# Altium PCB SwitchingPowerSupplyCourse_Board.PcbDoc
Units mm, origin at the board's own origin, x right, y up, seen from the top; angles counter-clockwise.
Board outline 50 x 50 mm, 6 copper layers (L1, L2, L3, L4, L5, L6), stack 0.535 mm thick; 41 components, 28 nets, 119 pads, 96 vias.
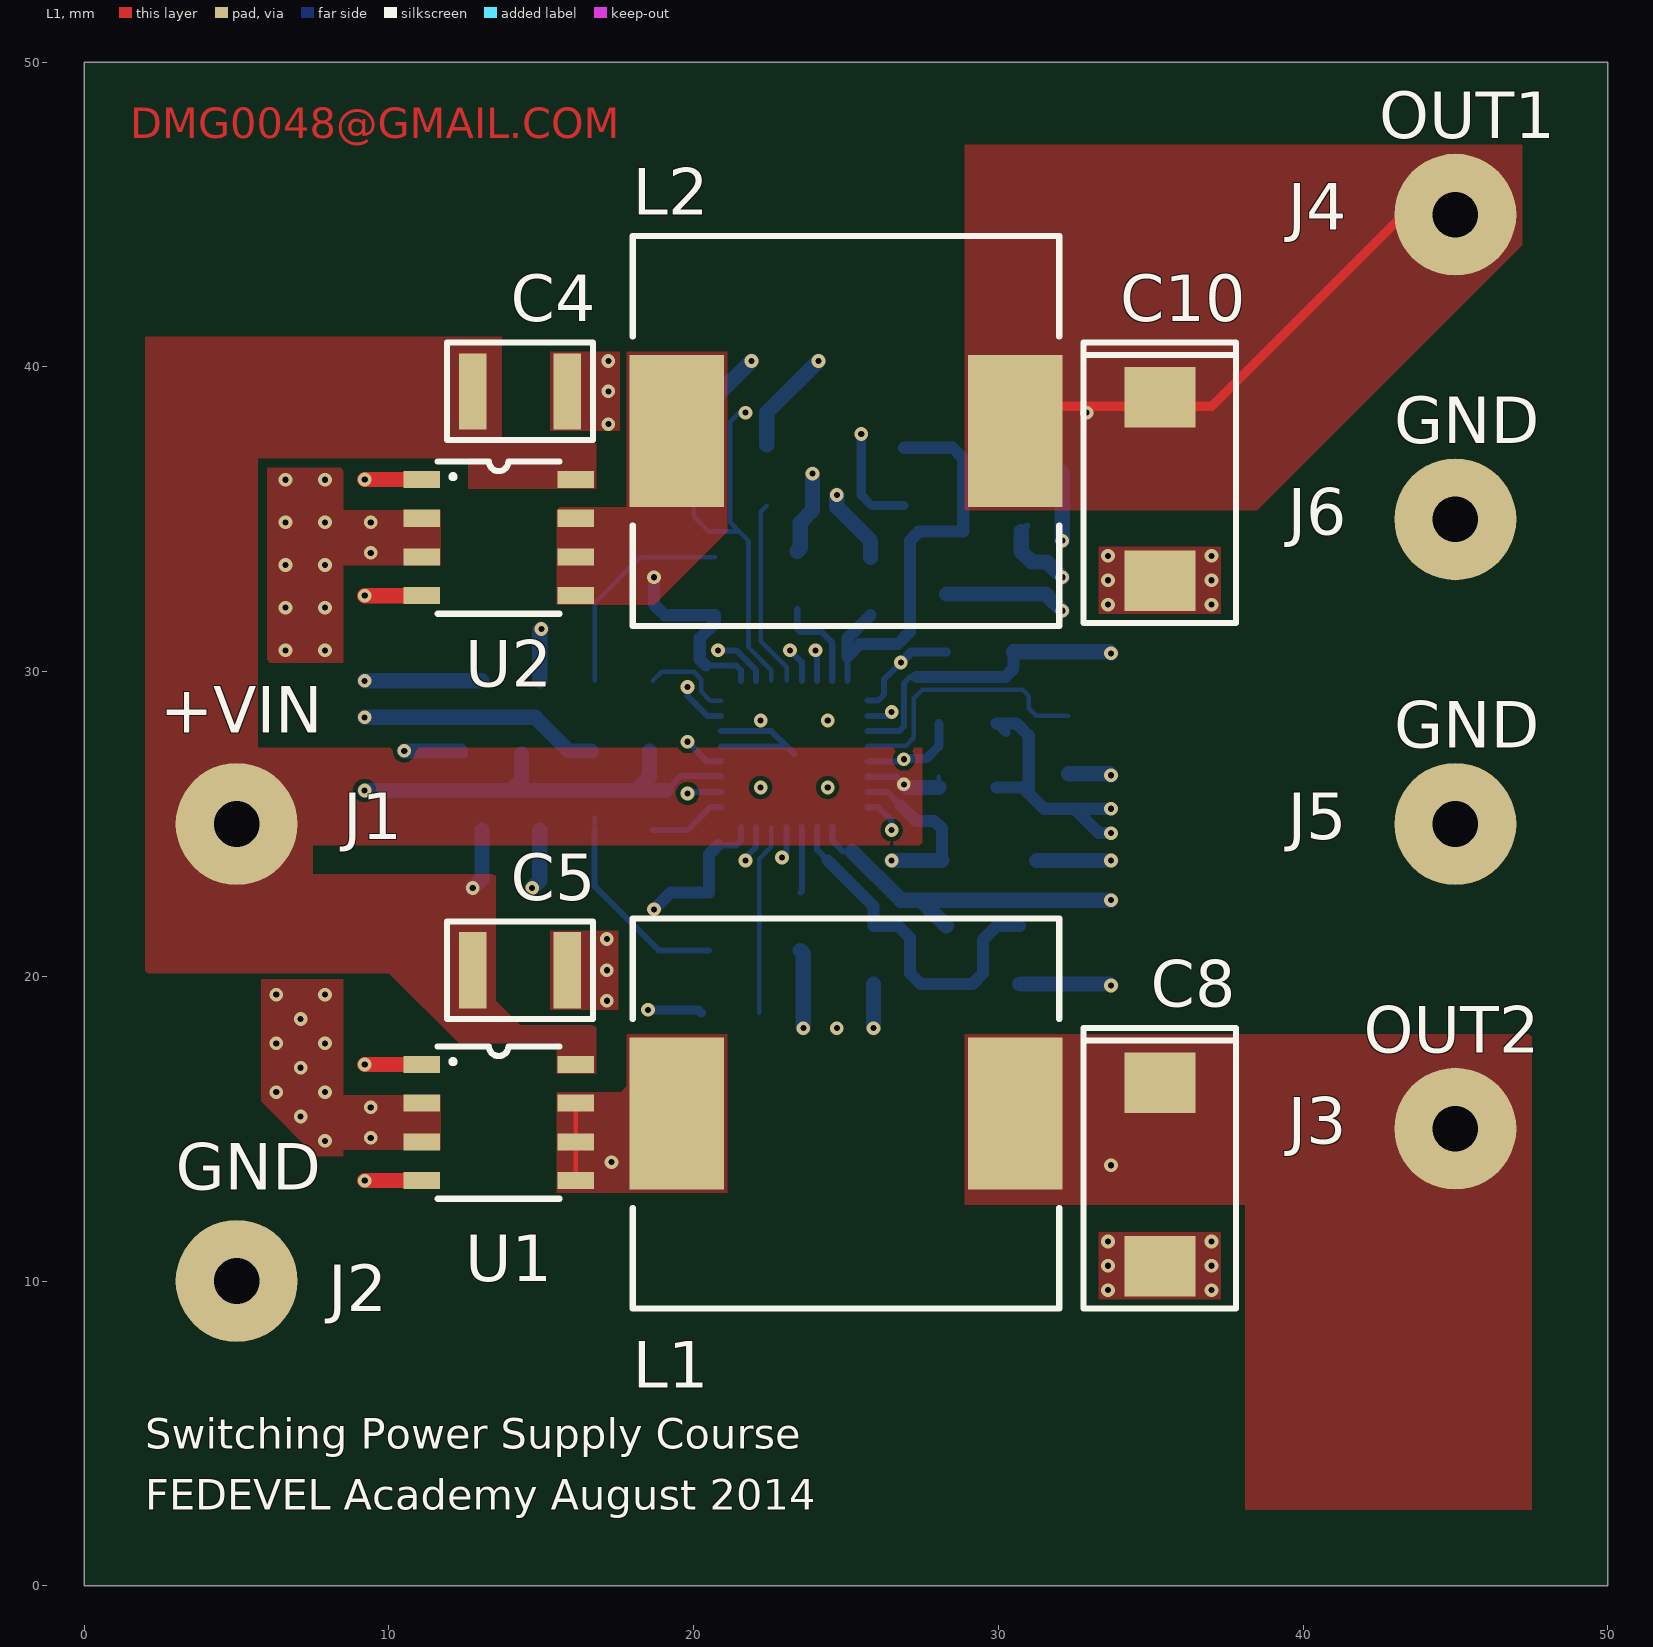
[diagram p0: L1 view]
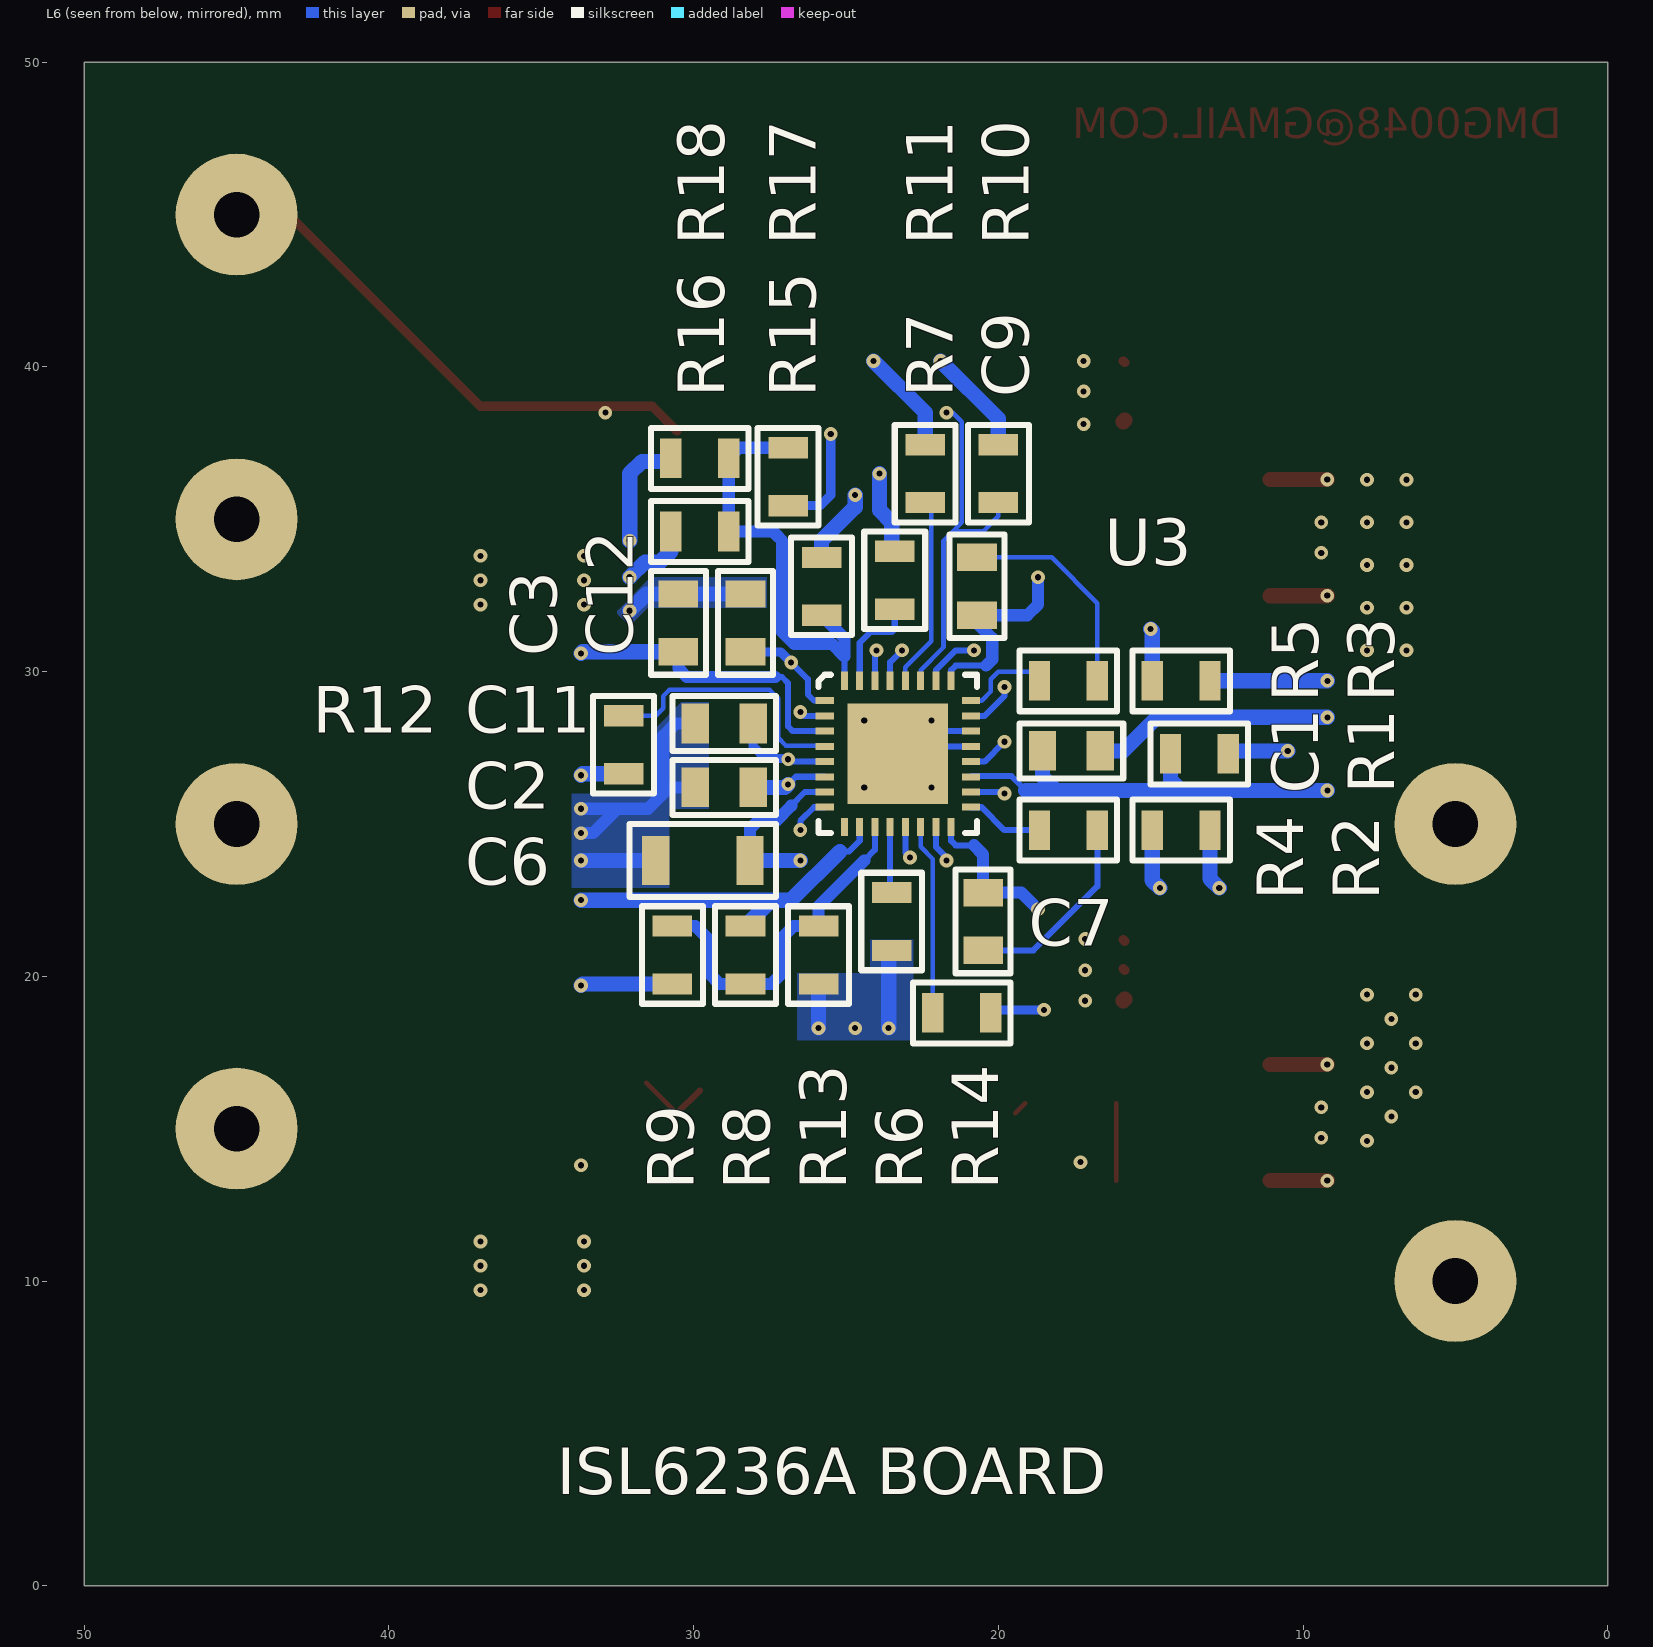
[diagram p1: L6 view, seen from below]
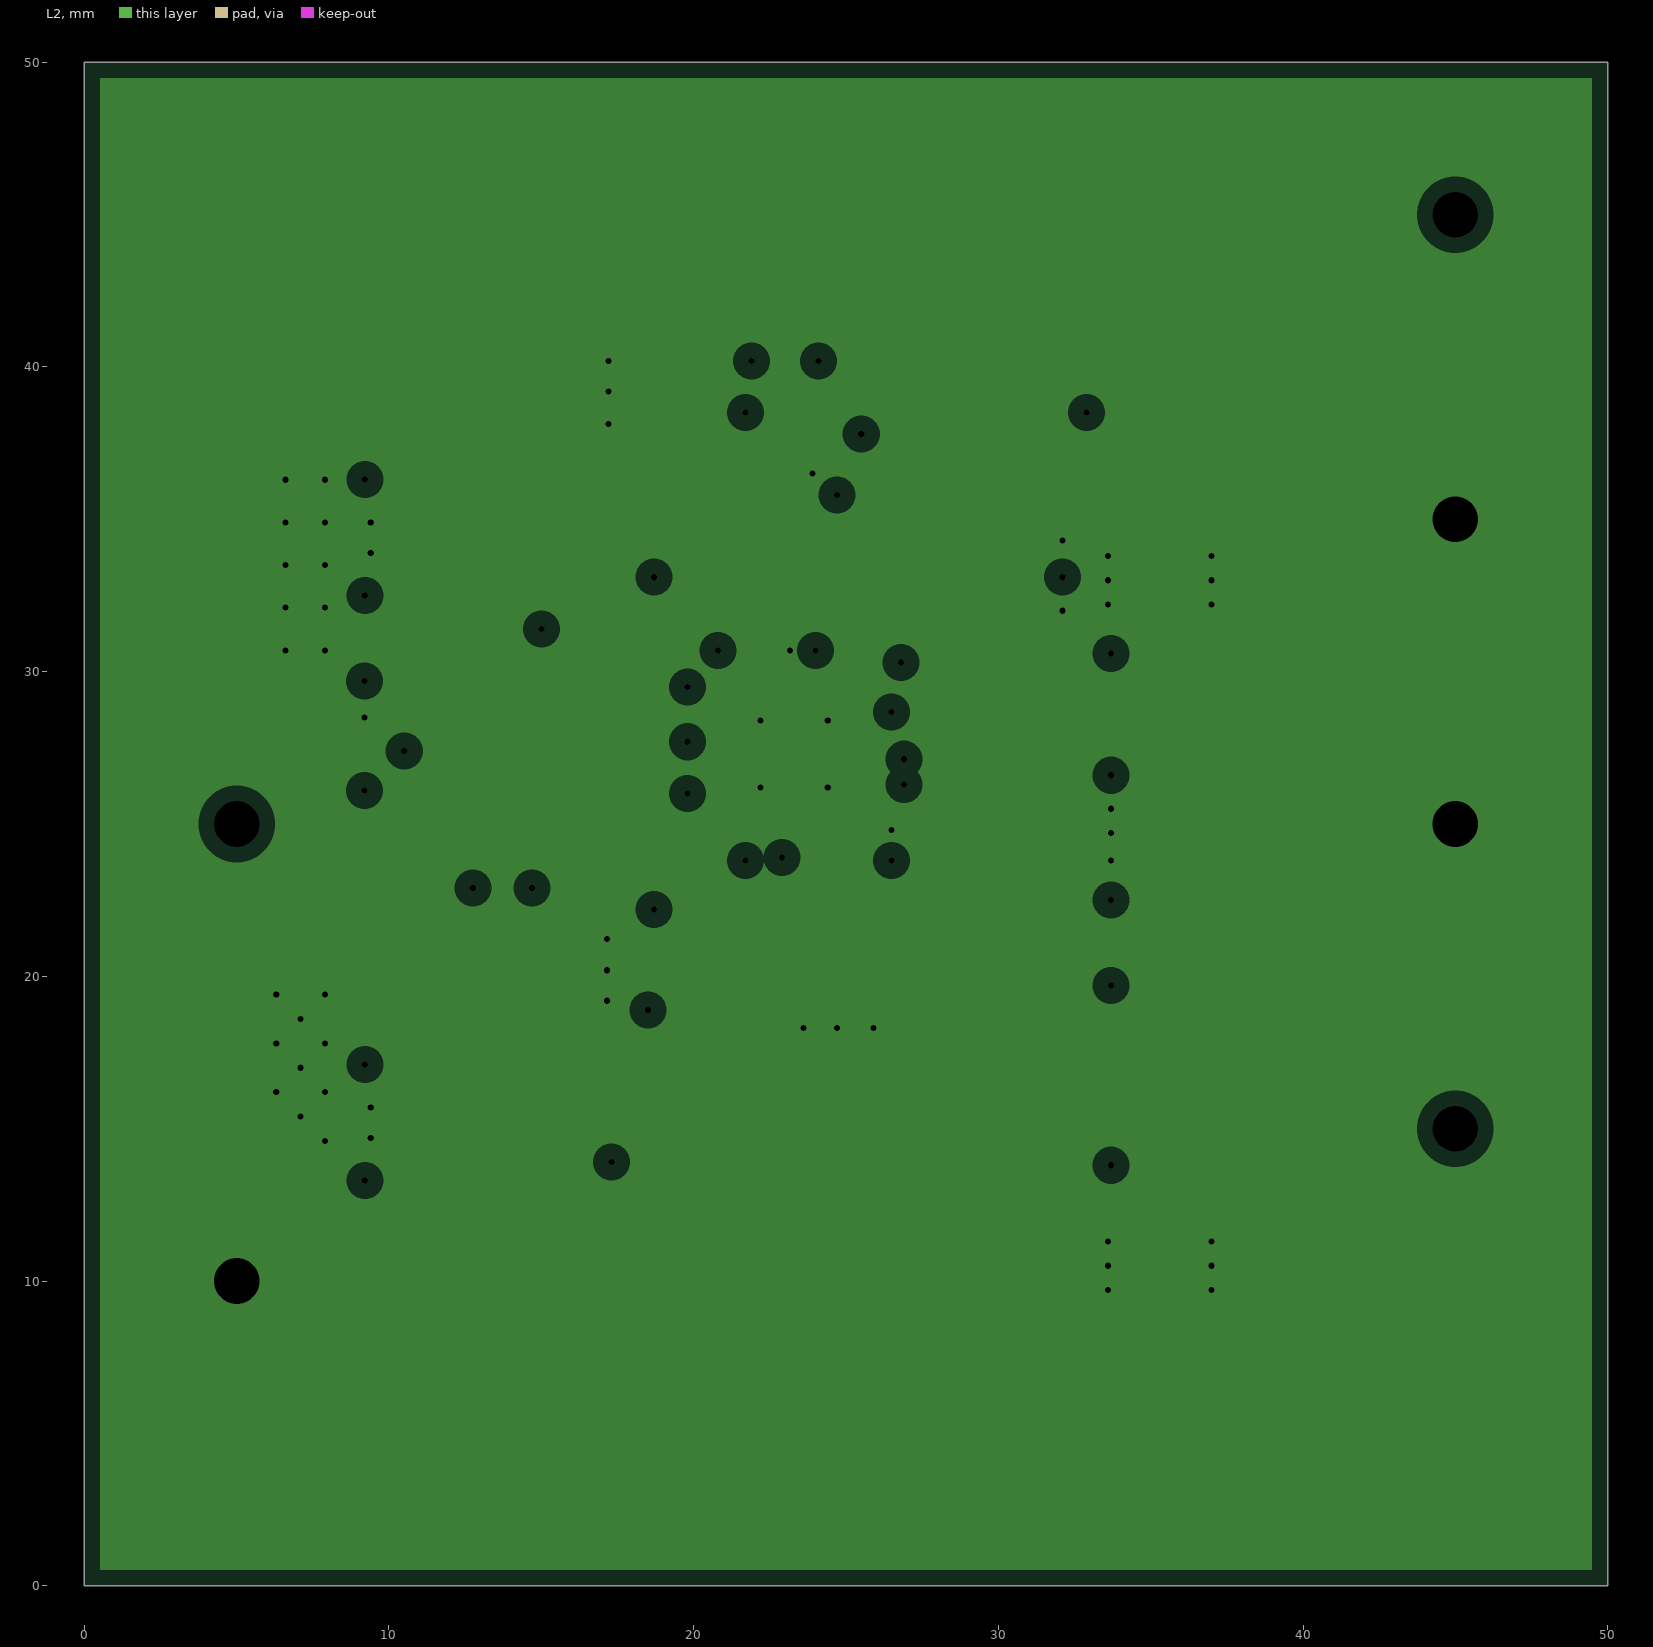
[diagram p2: L2, clearances drawn from the general rule]
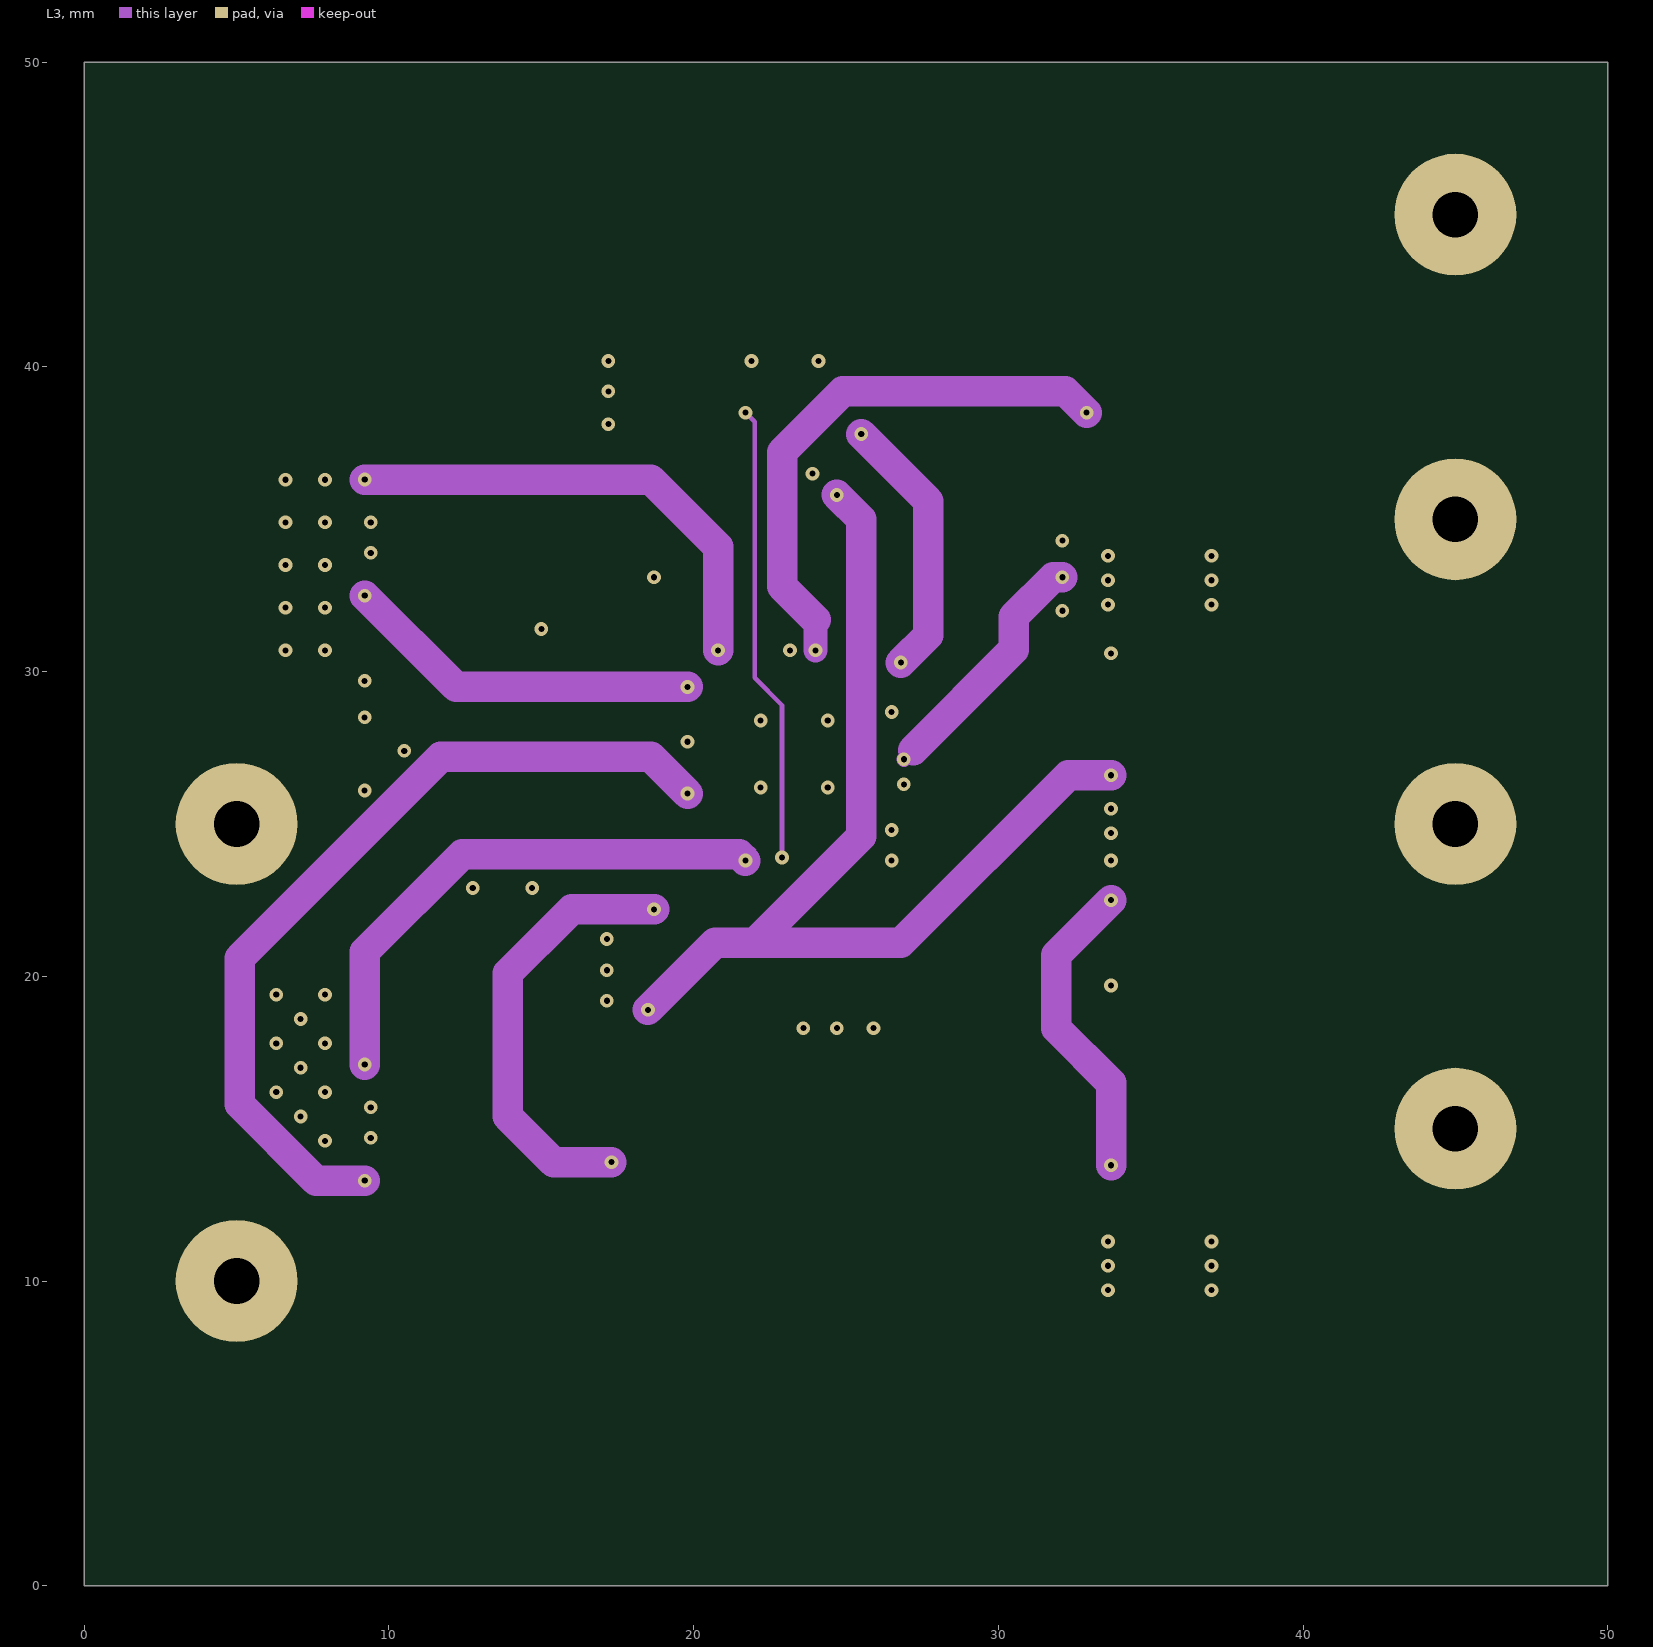
[diagram p3: L3]
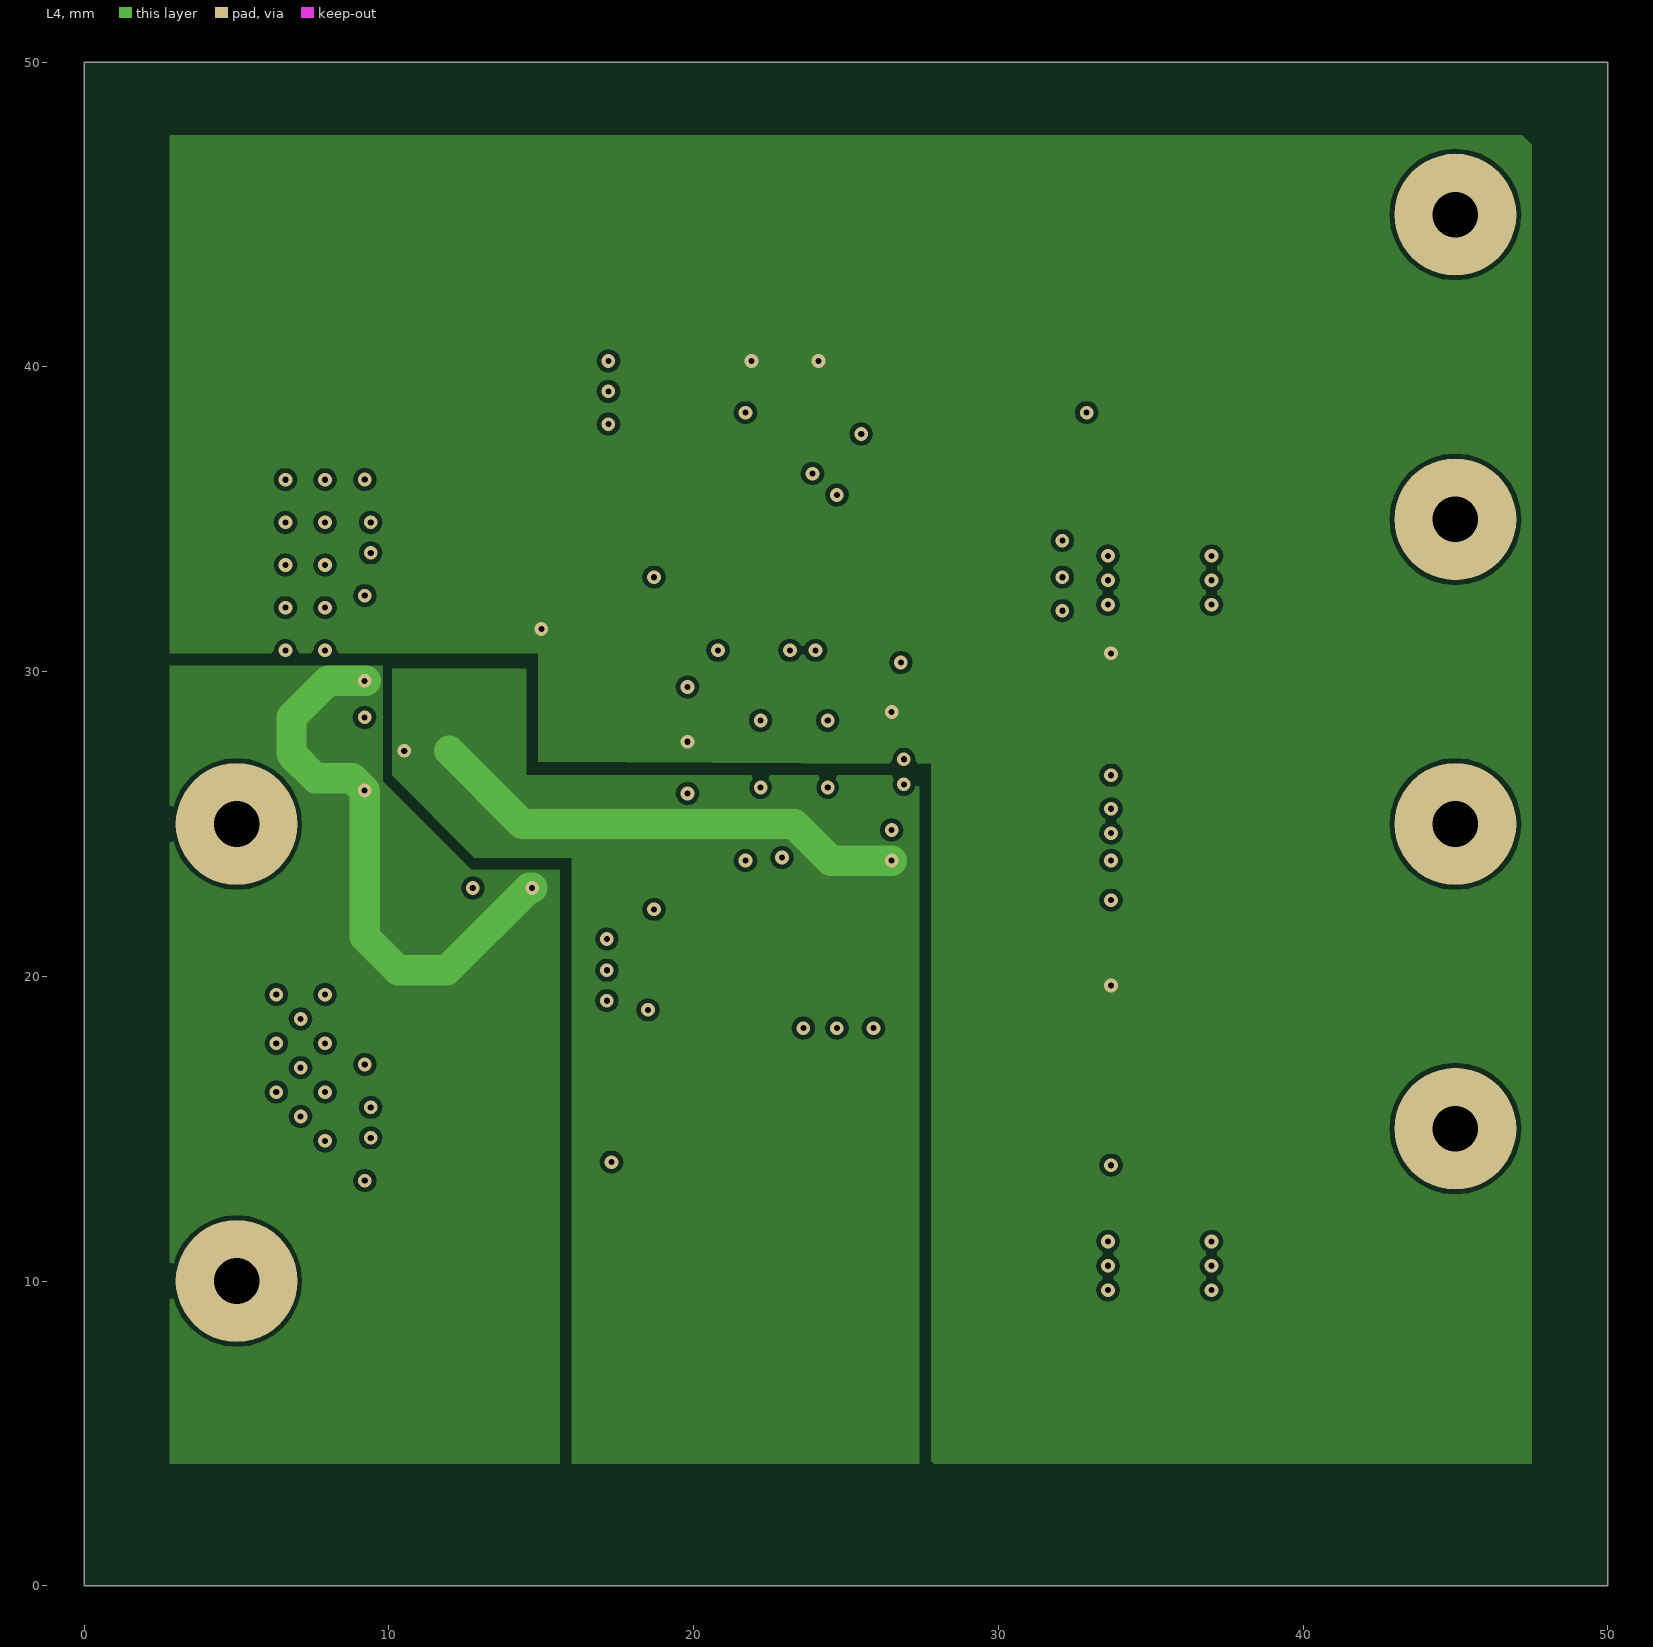
[diagram p4: L4]
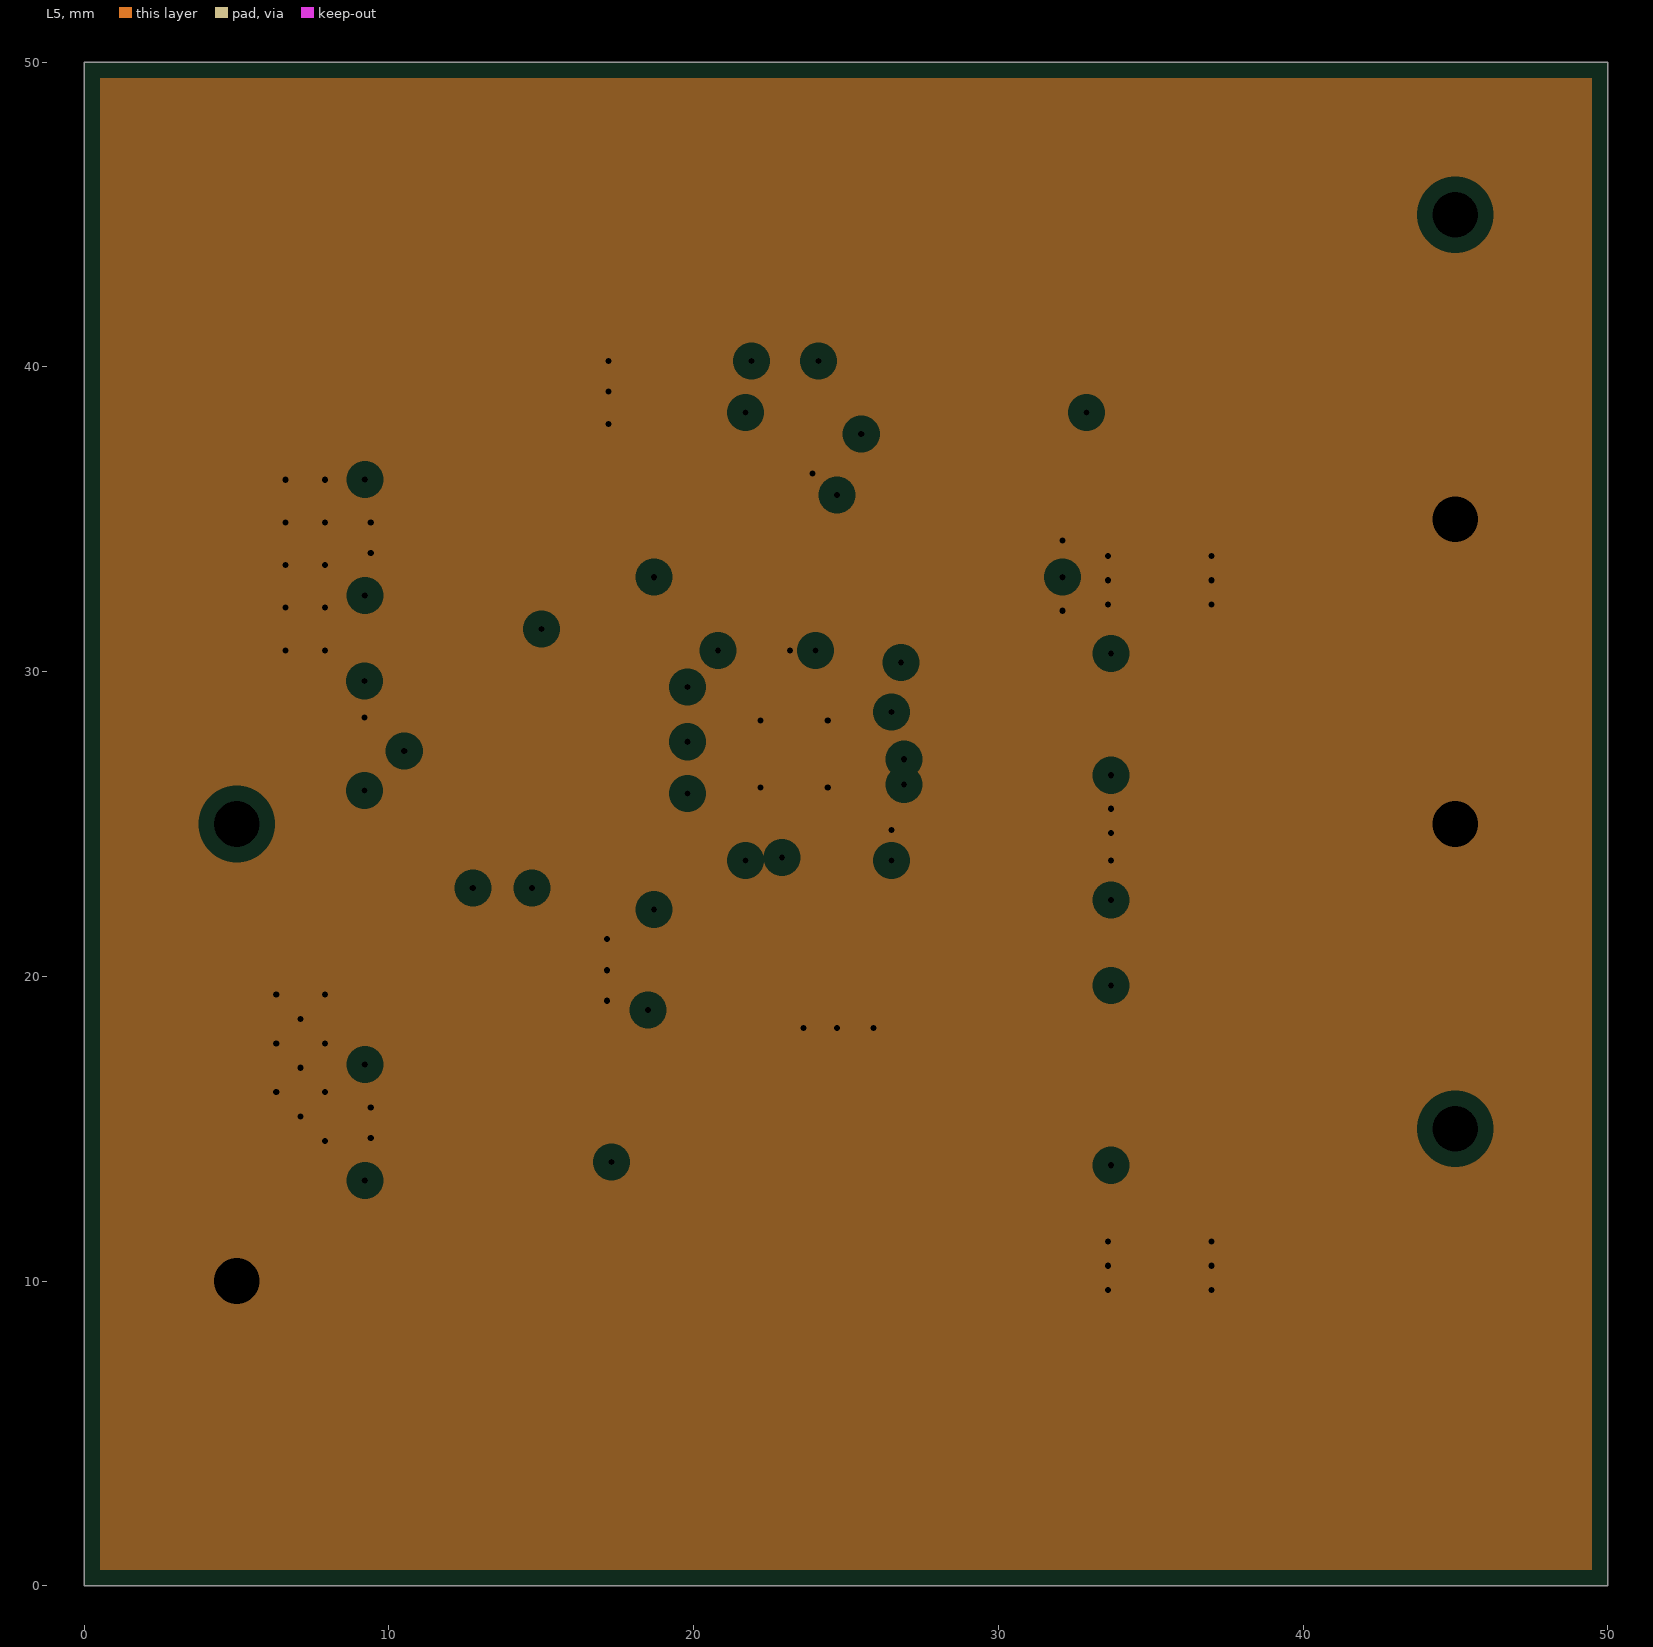
[diagram p5: L5, clearances drawn from the general rule]
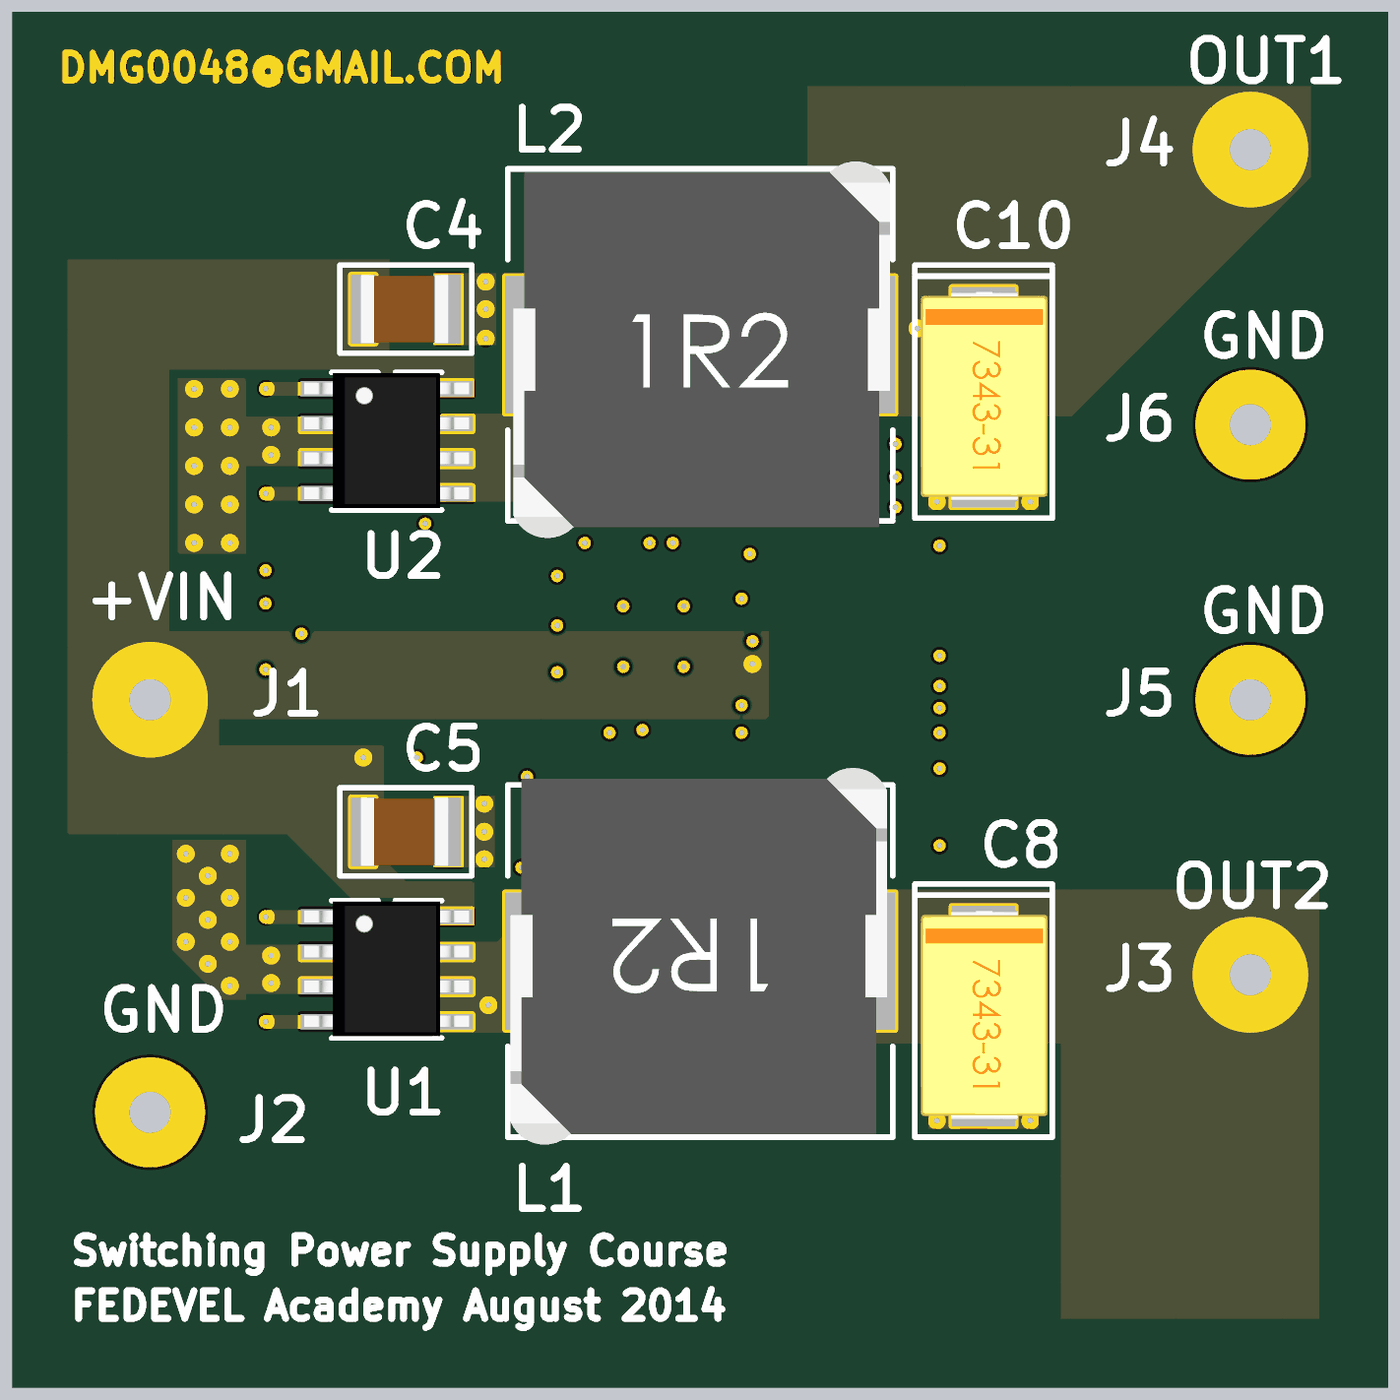
[diagram p6: 3D render of the assembled board from above, using the file's embedded part models]
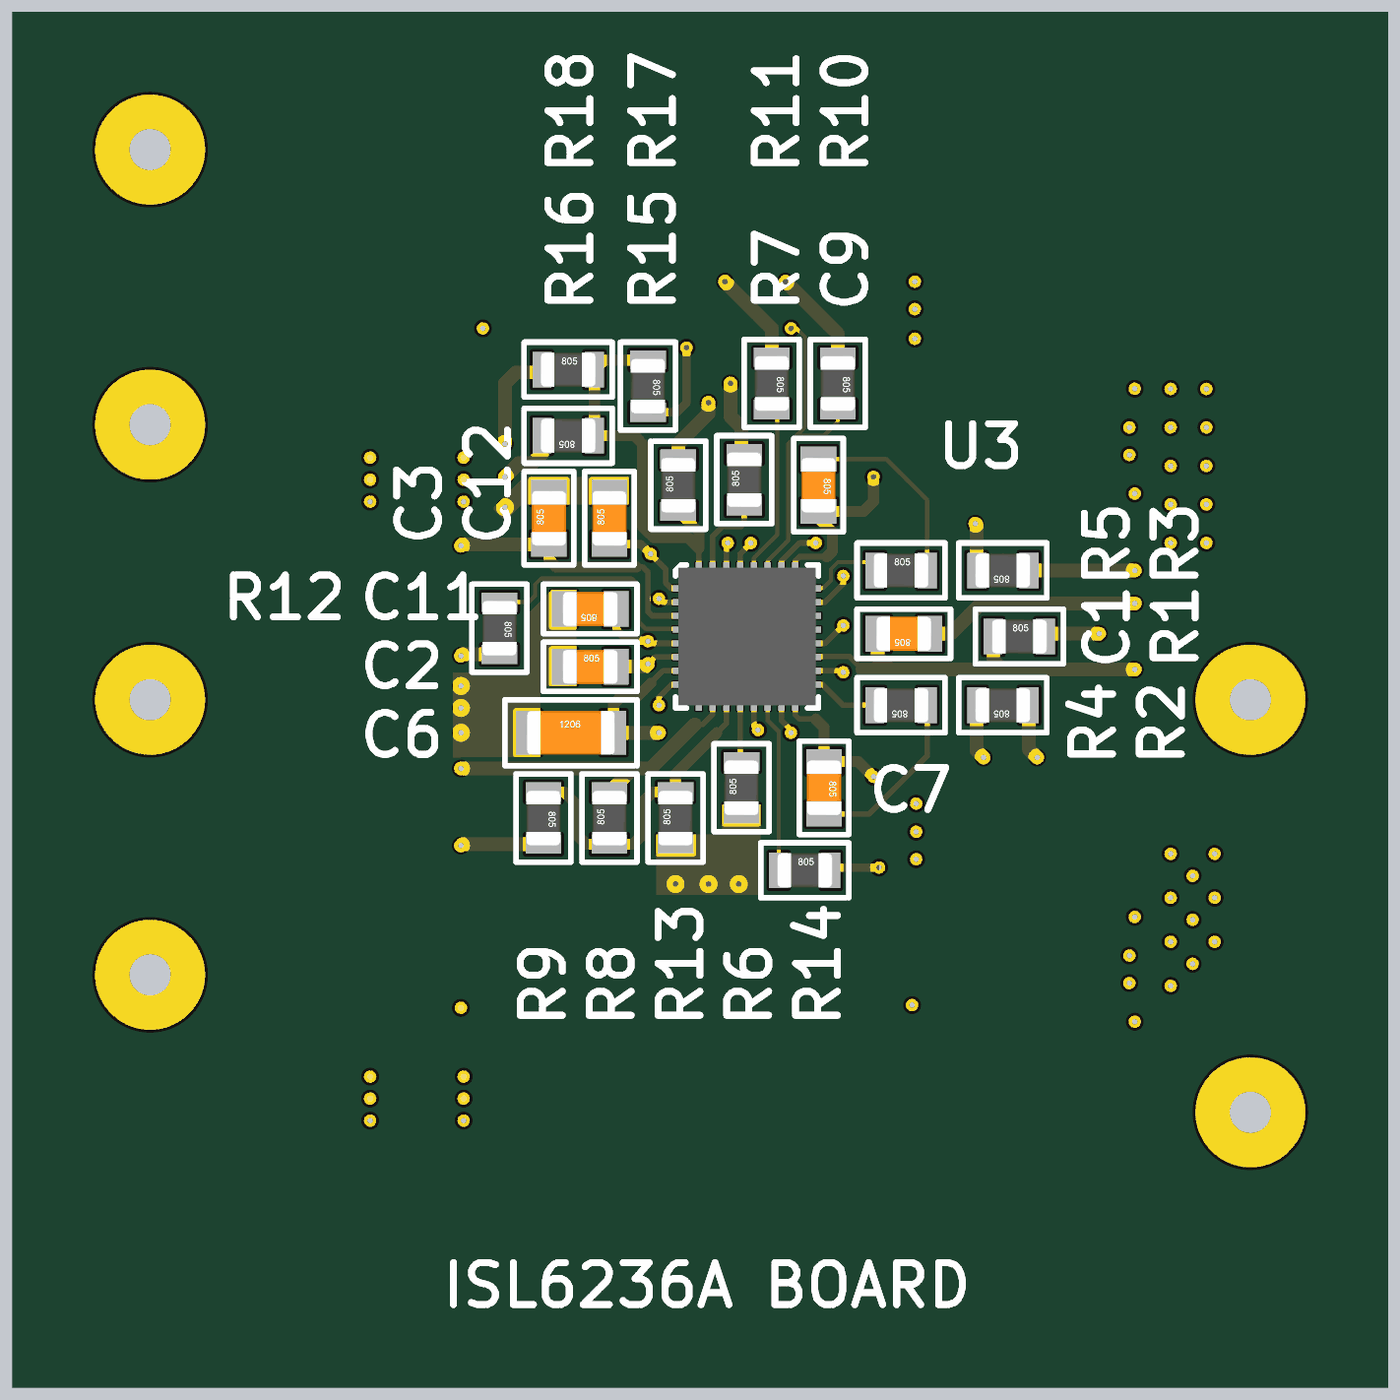
[diagram p7: 3D render of the assembled board from below, using the file's embedded part models]

## Layer stack, top to bottom
Top Solder: solder mask 0.0102, Solder Resist, Dk 3.5
L1: signal copper 0.0356
L2: plane copper 0.036, net GND
L3: signal copper 0.036
Dielectric 1: dielectric 0.32, FR-4, Dk 4.8
L4: signal copper 0.036
L5: plane copper 0.036, net GND
L6: signal copper 0.0356
Bottom Solder: solder mask 0.0102, Solder Resist, Dk 3.5

## Board outline
0,50 0,0 50,0 50,50 0,50

## Design rules (kind name [scope] priority, off if disabled: settings)
Clearance [All] p1: gap=0.15
ComponentClearance [All] p1: gap=0.1 collisioncheckmode=3 verticalgap=0.1 showdistances=FALSE
HoleSize [All] p1: absolutevalues=TRUE maxlimit=10 minlimit=0.025 maxpercent=80.000 minpercent=20.000
MinimumSolderMaskSliver [All] p1: minsoldermaskwidth=0.1
PlaneClearance [All] p1: clearance=0.508
PlaneConnect PlaneConnect_VIA [isvia] p1: planeconnectstyle=Direct reliefexpansion=0.508 reliefentries=4 reliefconductorwidth=0.254 reliefairgap=0.254
PlaneConnect PlaneConnect_1 [All] p2: planeconnectstyle=Relief reliefexpansion=0.508 reliefentries=4 reliefconductorwidth=0.254 reliefairgap=0.254
PolygonConnect [All] p1: connectstyle=Direct reliefconductorwidth=0.254 reliefentries=4 polygonreliefangle="90 Angle" airgapwidth=0.254
RoutingVias [All] p1: holewidth=0.2 width=0.45 viastyle="Through Hole" minholewidth=0.1 minwidth=0.4 maxholewidth=10 maxwidth=10
SilkToSolderMaskClearance [IsPad] p1: minsilkscreentomaskgap=0.1 clearancetoexposedcopper=TRUE
SolderMaskExpansion [All] p1: expansion=0.102
UnpouredPolygon [All] p1: allowunpoured=FALSE
Width [All] p1: maxlimit=10 minlimit=0.15 preferedwidth=0.15
23 further rules are at their usual default settings.

## Components (designator, comment, footprint, x,y, rotation, side; value= is the part's Value field where it differs from the comment)
C1 "1uF 50V" C0805 17.6,27.4 r0 bottom
C2 "1uF 50V" C0805 29,26.2 r180 bottom
C3 "1uF 50V" C0805 30.5,31.6 r90 bottom
C4 "10uF" C1210 14.3,39.2 r0 top locked
C5 "10uF" C1210 14.3,20.2 r0 top locked
C6 "4.7uF" C1206 29.7,23.8 r180 bottom
C7 "0.1uF" C0805 20.5,21.8 r270 bottom
C8 "330uF" 7343-31 35.3,13.5 r270 top locked
C9 "0.22uF" C0805 20.7,32.8 r270 bottom
C10 "330uF" 7343-31 35.3,36 r270 top locked
C11 "0.01uF" C0805 29,28.3 r0 bottom
C12 "0.1uF" C0805 28.3,31.6 r90 bottom
J1 "4mm X 1.5 mm PAD" PAD_WITH_HOLE_4mmX1.5mm#1 5,25 r0 top
J2 "4mm X 1.5 mm PAD" PAD_WITH_HOLE_4mmX1.5mm#2 5,25 r0 top
J3 "4mm X 1.5 mm PAD" PAD_WITH_HOLE_4mmX1.5mm#1 45,15 r0 top
J4 "4mm X 1.5 mm PAD" PAD_WITH_HOLE_4mmX1.5mm#1 45,45 r0 top
J5 "4mm X 1.5 mm PAD" PAD_WITH_HOLE_4mmX1.5mm#1 45,25 r0 top
J6 "4mm X 1.5 mm PAD" PAD_WITH_HOLE_4mmX1.5mm#1 45,35 r0 top
L1 "3.3uH" SRP1265A 25,15.5 r180 top locked
L2 "2.2uH" SRP1265A 25,37.9 r0 top locked
R1 "0" R0805 13.4,27.3 r180 bottom
R2 "0" R0805 14,24.8 r0 bottom
R3 "10" R0805 14,29.7 r0 bottom
R4 "1" R0805 17.7,24.8 r0 bottom
R5 "1" R0805 17.7,29.7 r180 bottom
R6 "200k" R0805 23.5,21.8 r90 bottom
R7 "200k" R0805 23.4,33 r90 bottom
R8 "DNF" R0805 28.3,20.7 r90 bottom
R9 "0" R0805 30.7,20.7 r270 bottom
R10 "200k" R0805 20,36.5 r270 bottom
R11 "200k" R0805 22.4,36.5 r270 bottom
R12 "10k" R0805 32.3,27.6 r270 bottom
R13 "DNF" R0805 25.9,20.7 r90 bottom
R14 "10k" R0805 21.2,18.8 r180 bottom
R15 "DNF" R0805 25.8,32.8 r90 bottom
R16 "0" R0805 29.8,34.6 r0 bottom
R17 "DNF" R0805 26.9,36.4 r270 bottom
R18 "DNF" R0805 29.8,37 r180 bottom
U1 "SI4816BDY-T1-GE3" SO-8 13.6,15.2 r0 top locked
U2 "SI4816BDY-T1-GE3" SO-8 13.6,34.4 r0 top locked
U3 "ISL6236AIRZ" L32.5x5B 23.3,27.3 r180 bottom

## Footprints (in the part's own frame and the unit in brackets; to place one, negate y for a bottom-side part, rotate by r counter-clockwise, add the part's x,y. Pads: shape width x height; smd on the part's side, far side on the other; paste and mask are expansions set on the pad)
7343-31 [mm]
  rect 1.99x2.33 smd: 1(-3.01,0) 2(3.01,0)
  silkscreen extent -4.8,-2.5 4.4,2.5, body extent -3.82,-2.27 3.78,2.33, height 3.1
C0805 [mm]
  rect 0.9x1.3 smd: 1(-0.95,0) 2(0.95,0)
  silkscreen extent -1.7,-0.9 1.7,0.9, body extent -1,-0.62 1,0.63, height 0.78
C1206 [mm]
  rect 0.9x1.6 smd: 1(-1.55,0) 2(1.55,0)
  silkscreen extent -2.4,-1.2 2.4,1.2, body extent -1.6,-0.8 1.6,0.8, height 1
C1210 [mm]
  rect 0.9x2.5 smd: 1(-1.55,0) 2(1.55,0)
  silkscreen extent -2.4,-1.6 2.4,1.6, body extent -1.65,-1.25 1.55,1.25, height 2.48
L32.5x5B [mm]
  rect 0.6x0.23 smd mask+0.051: 1(-2.4,1.75) 2(-2.4,1.25) 3(-2.4,0.75) 4(-2.4,0.25) 5(-2.4,-0.25) 6(-2.4,-0.75) 7(-2.4,-1.25) 8(-2.4,-1.75) 17(2.4,-1.75) 18(2.4,-1.25) 19(2.4,-0.75) 20(2.4,-0.25) 21(2.4,0.25) 22(2.4,0.75) 23(2.4,1.25) 24(2.4,1.75)
  rect 0.23x0.6 smd mask+0.051: 9(-1.75,-2.4) 10(-1.25,-2.4) 11(-0.75,-2.4) 12(-0.25,-2.4) 13(0.25,-2.4) 14(0.75,-2.4) 15(1.25,-2.4) 16(1.75,-2.4) 25(1.75,2.4) 26(1.25,2.4) 27(0.75,2.4) 28(0.25,2.4) 29(-0.25,2.4) 30(-0.75,2.4) 31(-1.25,2.4) 32(-1.75,2.4)
  rect 3.3x3.3 smd mask+0.051: 33(0,0)
  silkscreen extent -2.6,-2.6 2.6,2.6, body extent -2.5,-2.5 2.5,2.5, height 0.85
PAD_WITH_HOLE_4mmX1.5mm#1 [mm]
  round 4 hole 1.5: 1(0,0)
PAD_WITH_HOLE_4mmX1.5mm#2 [mm]
  round 4 hole 1.5: 1(0,-15)
R0805 [mm]
  rect 0.7x1.3 smd: 1(-0.95,0) 2(0.95,0)
  silkscreen extent -1.6,-1 1.6,1, body extent -1,-0.62 1,0.63
SO-8 [mm]
  rect 1.194x0.559 smd: 1(-2.527,1.905) 2(-2.527,0.635) 3(-2.527,-0.635) 4(-2.527,-1.905) 5(2.527,-1.905) 6(2.527,-0.635) 7(2.527,0.635) 8(2.527,1.905)
  silkscreen extent -2,-2.5 2,2.5, body extent -2.99,-2.43 3,2.47, height 1.58
SRP1265A [mm]
  rect 3.1x5 smd: 1(-5.55,0) 2(5.55,0)
  silkscreen extent -7,-6.4 7,6.4, body extent -6.8,-7.02 6.9,6.67, height 7

## Part data
C1 C2 C3: library part UMK212F105ZG-T, "Multilayer Ceramic Capacitors MLCC - SMD/SMT CAP MLCC 0805 50V Y5V 1uF +80/-20%"
C4 C5: library part UMK325BJ106MM-T, "Multilayer Ceramic Capacitors MLCC - SMD/SMT CAP MLCC 1210 50V X5R 10uF 20%"
C6: library part 1206ZD475KAT2A, "Multilayer Ceramic Capacitors MLCC - SMD/SMT 1206 4.7uF 10volts X5R 10%"
C7 C12: library part 0805J0500104KJT, "Multilayer Ceramic Capacitors MLCC - SMD/SMT 50volts 0.1uF 10%"
C8 C10: library part T495D337K010ATE150, "Tantalum Capacitors - Solid SMD 10volts 330uF 10% ESR=150mOhms"
C9: library part UMK212B7224KG-T, "Multilayer Ceramic Capacitors MLCC - SMD/SMT CAP MLCC 0805 50V X7R 0.22uF 10%"
C11: library part VJ0805Y103JXAPW1BC, "Multilayer Ceramic Capacitors MLCC - SMD/SMT 0805 0.01uF 50volts X7R 5%"
J1 J2 J3 J4 J5 J6: library part 4mmX1.5mm_PAD, "Elliptical pad 4mm x 1.5 mm"
L1: library part SRP1265A-3R3M, "Fixed Inductors 3.3uH 20% SMD 1265"
L2: library part SRP1265A-2R2M, "Fixed Inductors 2.2uH 20% SMD 1265"
R1 R2 R9 R16: library part RK73Z2ATTD, "Thick Film Resistors - SMD ZEROohms JUMPER"
R3: library part CRCW080510R0FKEA, "Thick Film Resistors - SMD 1/8watt 10ohms 1% 100ppm"
R4 R5: library part CRCW08051R00FKEA, "Thick Film Resistors - SMD 1/8watt 1ohms 100ppm"
R6 R7 R10 R11: library part RK73H2ATTD2003F, "Thick Film Resistors - SMD 1/8watts 200Kohms 1%"
R8 R13 R15 R17 R18: library part RES, "Generic Do Not Fit Capacitor"
R12 R14: library part SG73P2ATTD1002F, "Thick Film Resistors - SMD 0.25W 10Kohm 1% 200ppm"
U1 U2: "MOSFET Dua lN-Ch w/Schottky 30V 18.5/11.5mohm"
U3: "Switching Controllers ISL6236 QD QUTPUT CNTRLR IMVP-6 32LD"

## Via types
v1: diameter 0.45, hole 0.2, L1 to L6, 96 vias

## Nets (pads, with @x,y where several pads share a name; then routed paths per layer and width w, separated by ;. In a path a pad name is that pad's centre, name@x,y a point inside that pad or via, vN(x,y) a via of type N, cw(c..) or ccw(c..) an arc to the next point about the centre after c; other vN are vias at no path point)
+1.05V: C10.1 J4.1 L2.2 U3.30 | length 36.5
  L1 w0.3: L2.2 31.36,38.71 37,38.71 43.29,45 J4.1
  L3 w0.8: v1(24,30.7) 24,31.7
  L3 w1: 24,31.7 22.9,32.8 22.9,37.2 24.9,39.2 32.2,39.2 v1(32.9,38.5)
  L6 w0.2: v1(24,30.7) 24.05,30.65 U3.30
+1.50V: C8.1 J3.1 L1.1 R8.2 U3.10 | length 24.3
  L1 w0.15: L1.1 L1.1@31.56,16.51
  L1 w0.2: L1.1@29.8,16.25 L1.1
  L3 w1: v1(33.7,13.8) 33.7,16.5 31.9,18.3 31.9,20.7 v1(33.7,22.5)
  L6 w0.2: U3.10 24.55,24.45 24.9,24.1 25.2,24.1
  L6 w0.5: 25.2,24.1 26.8,22.5 27.45,22.5 ; R8.2 27.45,22.5 ; v1(33.7,22.5) 27.45,22.5
+5V_LDO: C6.2 R1.2 U3.7 | length 23.7
  L4 w1: 11.974,27.4 14.374,25 23.3,25 24.5,23.8 v1(26.5,23.8)
  L6 w0.2: U3.7 26.35,26.05 26.8,25.6
  L6 w0.3: R1.2@12.35,27.4 R1.2
  L6 w0.4: 26.8,25.6 27.3,25.1 27.9,25.1 28.15,24.85 C6.2
  L6 w0.5: v1(10.5,27.4) R1.2@12.35,27.4 ; v1(26.5,23.8) C6.2
+5V_PVCC: C1.2 R1.1 R2.2 R3.1 U3.19 | length 39.5
  L4 w1: v1@9.237,29.7 v1(9.2,29.7) 8,29.7 6.8,28.5 6.8,27.3 7.6,26.5 8.8,26.5 v1(9.2,26.1) 9.2,21.3 10.3,20.2 11.9,20.2 14.6,22.9 v1(14.7,22.9)
  L6 w0.2: 19.1,26.1 19.575,26.575 20.875,26.575 U3.19
  L6 w0.5: v1(9.2,26.1) 14,26.1 ; v1(9.2,29.7) R3.1 ; R1.1 14.35,26.45 14,26.1 ; v1(14.7,22.9) 14.95,23.15 R2.2 ; C1.2 18.55,26.55 18.1,26.1 ; 19.1,26.1 18.1,26.1 ; 14,26.1 18.1,26.1
+5V_VCC: C3.1 R3.2 R9.2 R10.1 R11.1 U3.2 U3.3 U3.20 | length 24.6
  L4 w0.2: v1@21.8,40.2 v1(21.9,40.2) ; v1@33.6,30.7 v1(33.7,30.6)
  L6 w0.2: R3.2 R3.2@15,29.75 ; v1(19.8,27.7) 20.45,27.05 U3.20 ; U3.3 26.75,28.05 26.9,28.2 26.9,29.624 27.101,29.825 27.324,29.825 ; U3.2 26.375,28.55 v1(26.5,28.675)
  L6 w0.3: R9.2 R9.2@30.75,19.7
  L6 w0.4: 27.324,29.825 30.225,29.825 30.5,30.1 C3.1
  L6 w0.5: R3.2 14.95,31.35 v1(15,31.4) ; R10.1 20,38.3 v1(21.9,40.2) ; R11.1 22.4,38.5 v1(24.1,40.2) ; C3.1 33.65,30.65 v1(33.7,30.6) ; R9.2 33.65,19.75 v1(33.7,19.7)
+REF: C12.1 R17.2 U3.1 | length 15.9
  L3 w1: v1(25.5,37.8) 27.7,35.6 27.7,31.2 v1(26.8,30.3)
  L6 w0.2: U3.1 26.05,29.05 26.25,29.25 26.25,29.75 v1(26.8,30.3)
  L6 w0.3: v1(25.5,37.8) 25.5,35.8 25.85,35.45 R17.2 ; v1(26.8,30.3) 27.15,30.65 C12.1
+REFIN2: R15.1 R16.1 R17.1 R18.2 U3.32 | length 14.2
  L6 w0.2: U3.32 25.05,30.5 ; 27.1,34.3 27.2,34.4
  L6 w0.4: R15.1 25.05,31.1 25.05,30.5 25.454,30.904 26.696,30.904 27.093,31.3 27.1,31.3 27.1,34.3 ; R17.1 28.5,37.35 R18.2 R16.1 27.4,34.6 27.2,34.4
+VCC: R12.2 R14.2 R15.2 | length 40.8
  L3 w1: v1(18.5,18.9) 20.7,21.1 22,21.1 ; v1(24.7,35.8) 25.5,35 25.5,24.6 22,21.1 ; v1(33.7,26.6) 32.3,26.6 26.8,21.1 22,21.1
  L6 w0.3: v1(18.5,18.9) 20.15,18.9 R14.2 ; R15.2@25.8,33.65 R15.2 ; R12.2 R12.2@32.35,26.6
  L6 w0.5: v1(24.7,35.8) 24.7,35.4 25.8,34.3 R15.2 ; R12.2 33.65,26.65 v1(33.7,26.6)
+VIN: C2.2 C4.1 C5.1 J1.1 R2.1 U1.8 U2.8 U3.6 | length 4.9
  L6 w0.15: C2.2 C2.2@28.05,26.55
  L6 w0.2: U3.6 26.65,26.55 v1(26.9,26.3)
  L6 w0.5: v1(12.75,22.9) 13.05,23.2 R2.1 ; v1(26.9,26.3) 27,26.2 C2.2
+VREF3: C11.1 R16.2 U3.5 | length 14.2
  L3 w0.5: v1(26.9,27.125) 27.2,27.425
  L3 w1: 27.2,27.425 30.5,30.725 30.5,31.8 31.8,33.1 v1(32.1,33.1)
  L6 w0.2: U3.5 26.825,27.05 v1(26.9,27.125) ; v1@26.85,27.05 v1@26.9,27 ; R16.2 R16.2@30.95,34.8
  L6 w0.3: v1@27.05,27.15 27.65,27.15 28.05,27.55 C11.1
  L6 w0.5: R16.2 30.75,33.95 31.1,33.6 31.6,33.6 v1(32.1,33.1)
EN1: R14.1 U3.14 | length 6.3
  L6 w0.15: R14.1 22.15,23.85 22.55,24.25 U3.14
EN_LDO: R12.1 U3.4 | length 8.7
  L6 w0.15: U3.4 25.725,27.575 26.975,27.575 27.225,27.825 27.225,29.125 27.5,29.4 30.8,29.4 31,29.2 31,28.8 31.25,28.55 R12.1
FB1: R8.1 R9.1 R13.2 U3.11 | length 11.7
  L6 w0.2: U3.11 24.05,24.15 24.4,23.8
  L6 w0.4: 24.4,23.8 25.9,22.3 R13.2 26.714,21.65 27.1,21.264 27.1,20.1 27.45,19.75 R8.1 29.15,19.75 29.5,20.1 29.5,21.2 29.95,21.65 R9.1
GND: C1.1 C2.1 C3.2 C4.2 C5.2 C6.1 C8.2 C10.2 C11.2 C12.2 J2.1 J5.1 J6.1 R6.1 R7.2 R13.1 R18.1 U1.2 U1.3 U2.2 U2.3 U3.8 U3.21 U3.22 U3.29 U3.33 | length 41.7
  L1 w0.3: C5.2 C5.2@15.9,20.25 ; C5.2@15.85,21.15 C5.2@15.9,21.2 ; C4.2@15.85,40.15 C4.2@15.9,40.2
  L1 w0.5: C5.2@15.85,19.25 C5.2@15.9,19.2 ; C4.2@15.85,38.25 C4.2@15.9,38.2
  L6 w0.2: U3.21 U3.33@23.05,27.55 ; U3.22 22.55,28.05 U3.33@23.05,27.55 ; v1(23.16,30.7) 23.55,30.31 U3.29 ; U3.33 U3.33@23.05,27.55 ; U3.8 26.05,25.55 26.5,25.1 v1(26.5,24.8)
  L6 w0.3: C11.2 C11.2@30.25,28
  L6 w0.4: C2.1 30.8,26.2 31,26 ; C11.2 30.6,28.3 31,27.9 31,26 ; v1(33.7,24.7) 33.3,24.7 32.5,25.5 ; v1(33.7,25.5) 32.5,25.5 ; 31,26 31.5,25.5 32.5,25.5
  L6 w0.5: v1(9.2,28.5) 14.8,28.5 15.9,27.4 C1.1 ; R7.2 23.5,34.05 23.5,34.9 23.9,35.3 v1(23.9,36.5) ; R6.1 23.6,20.75 v1(23.6,18.3) ; v1(25.9,18.3) R13.1 ; C12.2 C3.2 31.55,32.55 v1(32.1,32) ; R18.1 30.85,36.9 31.7,36.9 32.1,36.5 v1(32.1,34.3) ; C6.1 v1(33.7,23.8)
  other v1: 33.6,9.7 37,9.7 33.6,10.5 37,10.5 33.6,11.3 37,11.3 7.9,14.6 9.4,14.7 7.1,15.4 9.4,15.7 6.3,16.2 7.9,16.2 7.1,17 6.3,17.8 7.9,17.8 24.7,18.3 7.1,18.6 17.15,19.2 6.3,19.4 7.9,19.4 17.15,20.2 17.15,21.225 22.2,26.2 24.4,26.2 22.2,28.4 24.4,28.4 6.6,30.7 7.9,30.7 6.6,32.1 7.9,32.1 33.6,32.2 37,32.2 33.6,33 37,33 6.6,33.5 7.9,33.5 33.6,33.8 37,33.8 9.4,33.9 6.6,34.9 7.9,34.9 9.4,34.9 6.6,36.3 7.9,36.3 17.2,38.125 17.2,39.2 17.2,40.2
LGATE1: U1.4 U3.18 | length 30.9
  L1 w0.5: v1(9.205,13.295) U1.4
  L3 w1: v1(9.205,13.295) 7.605,13.295 5.1,15.8 5.1,20.6 11.7,27.2 18.6,27.2 v1(19.8,26)
  L6 w0.2: v1(19.8,26) 19.85,26.05 U3.18
LGATE2: U2.4 U3.23 | length 15.4
  L1 w0.5: v1(9.205,32.495) U2.4
  L3 w1: v1(9.205,32.495) 12.2,29.5 v1(19.8,29.5)
  L6 w0.2: v1(19.8,29.5) 19.8,29.2 20.45,28.55 U3.23
NetC7_2: C7.2 R4.1 | length 6.9
  L6 w0.15: R4.1 R4.1@16.75,25.2
  L6 w0.2: R4.1 16.75,22.95 18.85,20.85 C7.2
NetC9_1: C9.1 R5.2 | length 7.1
  L6 w0.15: R5.2 16.75,32.25 18.25,33.75 C9.1
NetR4_2: R4.2 U3.17 | length 2.6
  L6 w0.2: R4.2 19.8,24.8 20.55,25.55 U3.17
NetR5_1: R5.1 U3.24 | length 3
  L6 w0.15: R5.1 18.95,30 19.999,30 20.25,29.749 20.25,29.35 20.55,29.05 U3.24
NetR6_2: R6.2 U3.12 | length 2.2
  L6 w0.2: R6.2 23.55,22.8 U3.12
NetR7_1: R7.1 U3.31 | length 3.2
  L6 w0.2: R7.1 23.4,31.4 23.5,31.3 24.2,31.3 24.55,30.95 U3.31
PHASE1: C7.1 L1.2 U1.5 U1.6 U1.7 U3.16 | length 22.4
  L1 w0.15: U1.5 U1.6 U1.7 ; L1.2@19.115,15.835 L1.2
  L3 w1: v1(17.3,13.9) 15.4,13.9 13.9,15.4 13.9,20.1 15.831,22.031 16,22.2 v1(18.7,22.2)
  L6 w0.2: 20.8,24.3 21.4,24.3 21.55,24.45 U3.16
  L6 w0.4: v1(18.7,22.2) 19.25,22.75 C7.1 20.5,24 20.8,24.3
PHASE2: C9.2 L2.1 U2.5 U2.6 U2.7 U3.25 | length 6.4
  L6 w0.2: 20.4,30.2 21.4,30.2 21.55,30.05 U3.25
  L6 w0.4: v1@18.7,33 18.7,32.2 19.05,31.85 C9.2 20.7,31.6 20.2,31.1 20.2,30.4 20.4,30.2
  other v1: 18.7,33.1
POK1: R10.2 U3.13 U3.27 | length 28
  L3 w0.15: v1(21.7,38.5) 22,38.2 22,29.8 22.9,28.9 v1(22.9,23.9)
  L6 w0.15: R10.2 20,35.1 20.5,34.6 21.5,34.6 ; v1(21.7,38.5) 21.5,38.5 21.2,38.2 21.2,34.9 21.5,34.6 ; U3.27 22.55,30.05 21.8,30.8 21.8,34.3 21.5,34.6
  L6 w0.2: v1(22.9,23.9) 23.05,24.05 U3.13
POK2: R11.2 U3.28 | length 6.2
  L6 w0.15: R11.2@22.4,35.45 22.2,35.25 22.2,31 23.05,30.15 U3.28
UGATE1: U1.1 U3.15 | length 20.9
  L1 w0.5: v1(9.205,17.105) U1.1
  L3 w1: v1(9.205,17.105) 9.205,20.805 12.4,24 21.5,24 v1(21.7,23.8)
  L6 w0.2: v1(21.7,23.8) 21.6,23.8 22.05,24.25 U3.15
UGATE2: U2.1 U3.26 | length 19.6
  L1 w0.5: v1(9.205,36.305) U2.1
  L3 w1: v1(9.205,36.305) 18.595,36.305 20.8,34.1 v1(20.8,30.7)
  L6 w0.2: v1(20.8,30.7) 21.4,30.7 22.05,30.05 U3.26
pads on no net: U3.9

## Polygon pours and split planes (outlines as drawn)
GND on L1 "L1-No Net" (solid, pour order 34): 11.7,14.3 11.7,16.1 8.5,16.1 8.5,17.4 8.5,19.9 5.8,19.9 5.8,15.9 7.6,14.1 8.5,14.1 8.5,14.3
GND on L1 "L1-No Net" (solid, pour order 35): 11.7,33.5 11.7,35.3 8.5,35.3 8.5,36.6 8.5,36.7 6,36.7 6,30.3 8.5,30.3 8.5,33.5
GND on L1 "L1-No Net" (solid, pour order 29): 33.3,34.1 37.3,34.1 37.3,31.9 33.3,31.9 33.3,34.1
GND on L1 "L1-No Net" (solid, pour order 30): 33.3,11.6 37.3,11.6 37.3,9.4 33.3,9.4 33.3,11.6
GND on L1 "L1-No Net" (solid, pour order 27): 15.3,21.5 17.525,21.5 17.525,18.9 15.3,18.9
GND on L1 "L1-No Net" (solid, pour order 28): 15.3,40.5 17.575,40.5 17.575,37.9 15.3,37.9
+VIN on L1 "L1-No Net" (solid, pour order 26): 5.7,32.7 5.7,27.5 27.5,27.5 27.5,24.3 7.5,24.3 7.5,23.35 13.5,23.35 13.5,20.1 2,20.1 2,32.7
+VIN on L1 "L1-No Net" (solid, pour order 25): 15.5,36 16.8,36 16.8,37.5 13.7,37.5 13.7,41 2,41 2,32.5 5.7,32.5 5.7,37 12.6,37 12.6,36 15.6,36
+VIN on L1 "L1-No Net" (solid, pour order 24): 15.5,16.8 16.8,16.8 16.8,18.5 16.7,18.4 14.3,18.4 13.5,19.2 13.5,23.3 10,23.3 10,20.1 12.3,17.8 15.5,17.8
+1.05V on L1 "L1-No Net" (solid, pour order 22): 28.9,47.3 28.9,35.3 32.2,35.3 38.5,35.3 47.2,44 47.2,46 47.2,47.3 45.9,47.3 44,47.3 43.9,47.3
PHASE1 on L1 "L1-No Net" (solid, pour order 21): 15.5,16.2 15.5,12.9 21.1,12.9 21.1,18.1 17.8,18.1 17.8,16.4 17.6,16.2 15.5,16.2 15.5,15.4
PHASE2 on L1 "L1-No Net" (solid, pour order 20): 15.5,32.2 16.8,32.2 18.7,32.2 21.1,34.6 21.1,40.4 21.1,40.5 20.9,40.5 20.7,40.5 20.3,40.5 19.5,40.5 19,40.5 18.7,40.5 18.1,40.5 17.8,40.5 17.8,35.4 15.6,35.4 15.5,35.3
+1.50V on L1 "L1-No Net" (solid, pour order 23): 28.9,18.1 28.9,12.5 38.1,12.5 38.1,2.5 47.5,2.5 47.5,12.5 47.5,18.1
GND on L6 "L1-No Net" (solid, pour order 33): 29.5,29 29.5,25.5 30.8,25.5 30.8,22.9 34,22.9 34,26 31.3,26 31.3,28.1 30.4,29 29.5,29
GND on L6 "L1-No Net" (solid, pour order 32): 22.8,21.2 24.2,21.2 24.2,20.1 26.6,20.1 26.6,17.9 22.8,17.9 22.8,21.2
GND on L6 "L1-No Net" (solid, pour order 31): 27.6,33.1 27.6,32.1 31.3,32.1 31.5,32.1 32,31.6 32.2,31.6 32.5,31.9 32.5,32 32.4,32.1 31.5,33 31.4,33.1
+5V_VCC on L4 "L1-No Net" (solid, pour order 38): 27.8,4 47.5,4 47.5,47.3 47.2,47.6 2.8,47.6 2.8,30.6 14.9,30.6 14.9,27.047 27.393,26.968 27.5,27 27.667,27 27.769,26.989 27.8,26.98 27.8,26.943
+5V_LDO on L4 "L1-No Net" (solid, pour order 37): 16,4 16,23.9 12.8,23.9 10.1,26.6 10.1,30.1 14.5,30.1 14.5,26.6 27.4,26.6 27.4,4
+5V_PVCC on L4 "L1-No Net" (solid, pour order 36): 9.8,30.2 3,30.2 2.8,30.2 2.8,4 15.6,4 15.6,23.5 12.7,23.5 9.8,26.4 9.8,30.2
GND on L2 (split plane): 49.49,0.51 0.51,0.51 0.51,49.49 49.49,49.49
GND on L5 (split plane): 49.49,0.51 0.51,0.51 0.51,49.49 49.49,49.49

## Other copper
L1:
  text "DMG0048@GMAIL.COM" at 1.5,47.5 h1

## Silkscreen, mask and mechanical layers (free items; w line width, h text height)
Top Overlay:
  text "OUT1" at 42.5,47.5 h1.52
  text "GND" at 43,37.5 h1.52
  text "+VIN" at 2.5,28 h1.52
  text "GND" at 43,27.5 h1.52
  text "OUT2" at 42,17.5 h1.52
  text "GND" at 3,13 h1.52
  text "Switching Power Supply Course" at 2,4.5 h1
  text "FEDEVEL Academy August 2014" at 2,2.5 h1
Bottom Overlay:
  text "ISL6236A BOARD" at 34.5,3 h1.52
Top Solder:
  text "DMG0048@GMAIL.COM" at 1.5,47.5 h1
Board Outline:
  lines w0.2: 0,50 50,50 50,0 0,0 0,50 ; 0,50 0,50